# Altium PCB WiFiBoard.PcbDoc
Units mil, origin at the board's own origin, x right, y up, seen from the top; angles counter-clockwise.
Board outline 2085 x 2160 mil, 2 copper layers (Top Layer, Bottom Layer); 26 components, 32 nets, 129 pads, 19 vias.
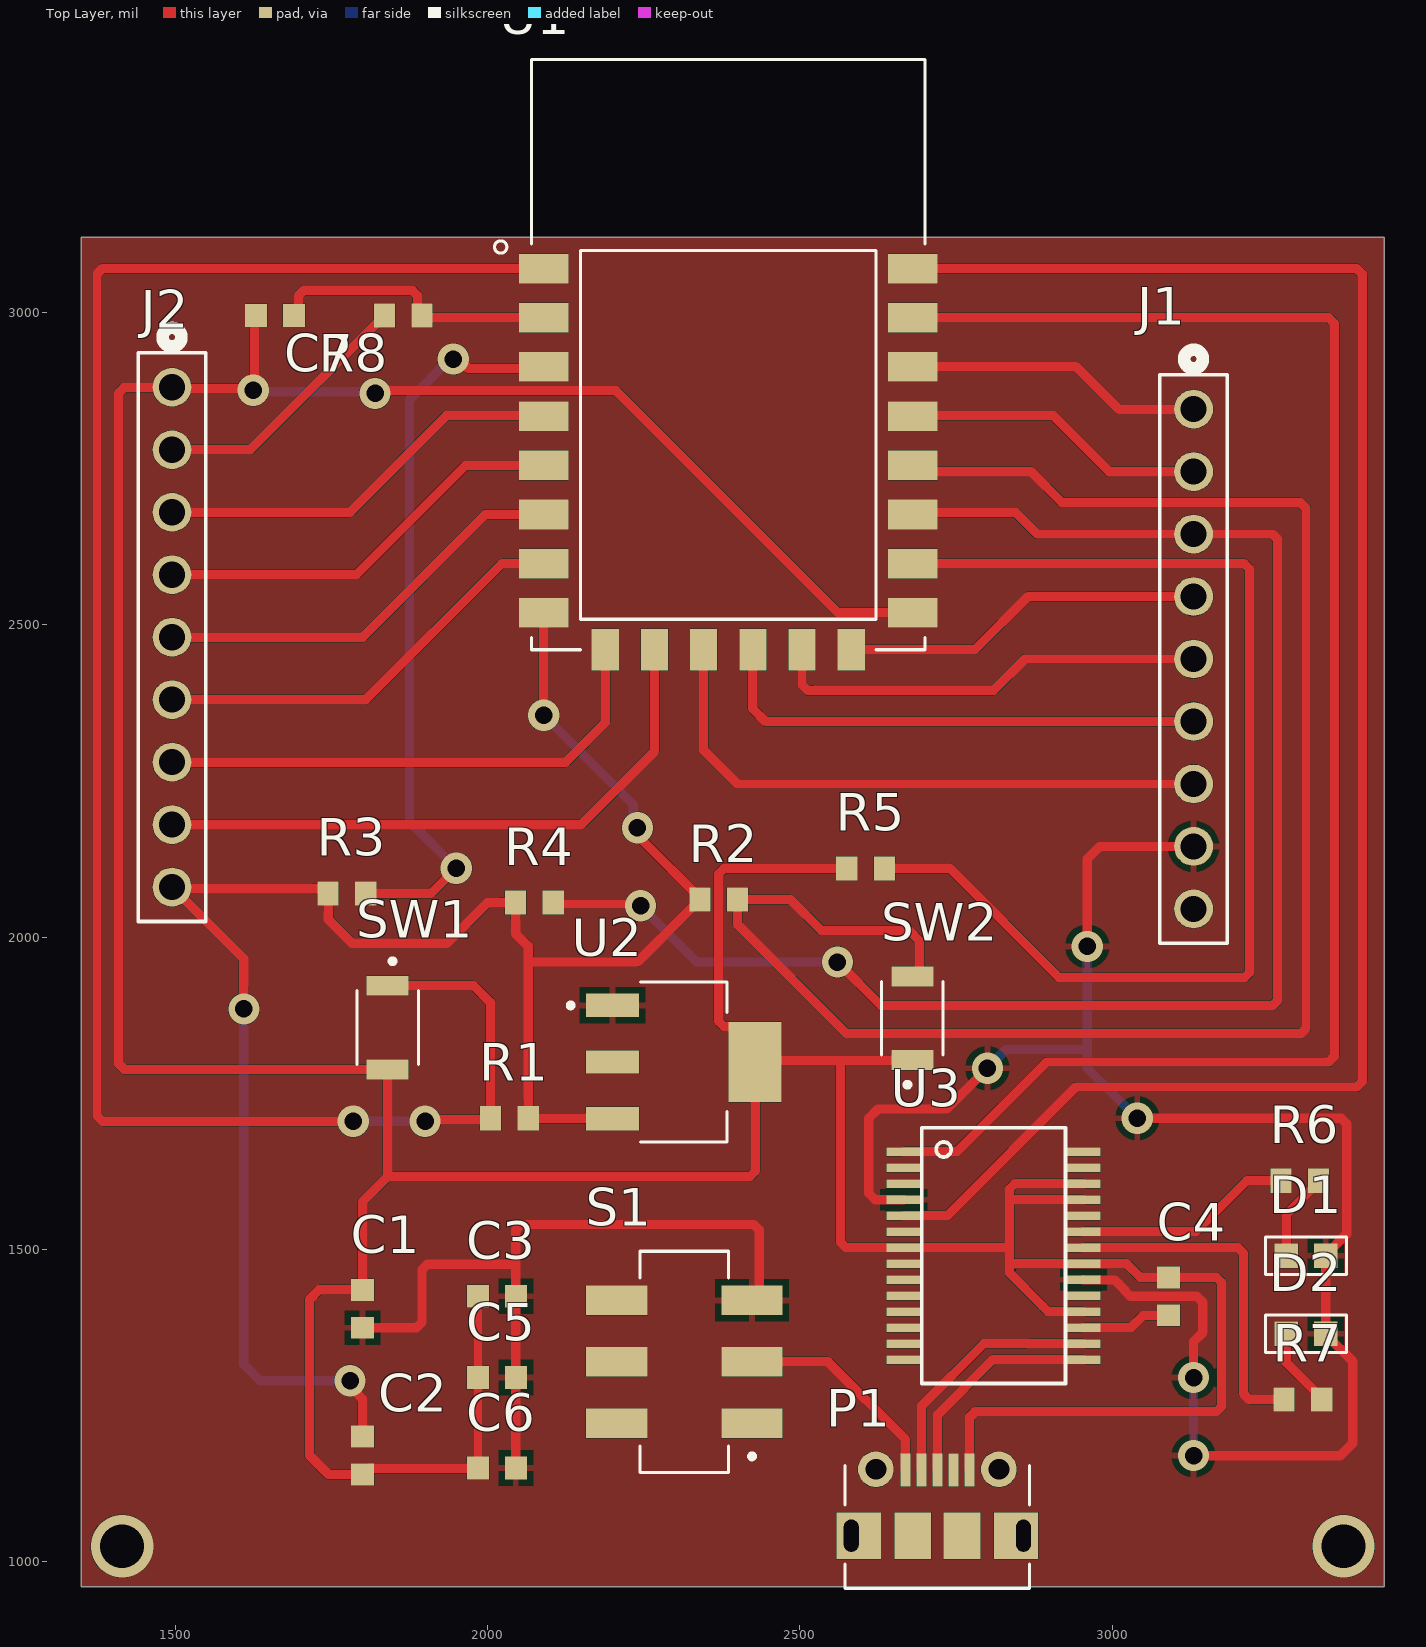
[diagram p0: Top Layer view]
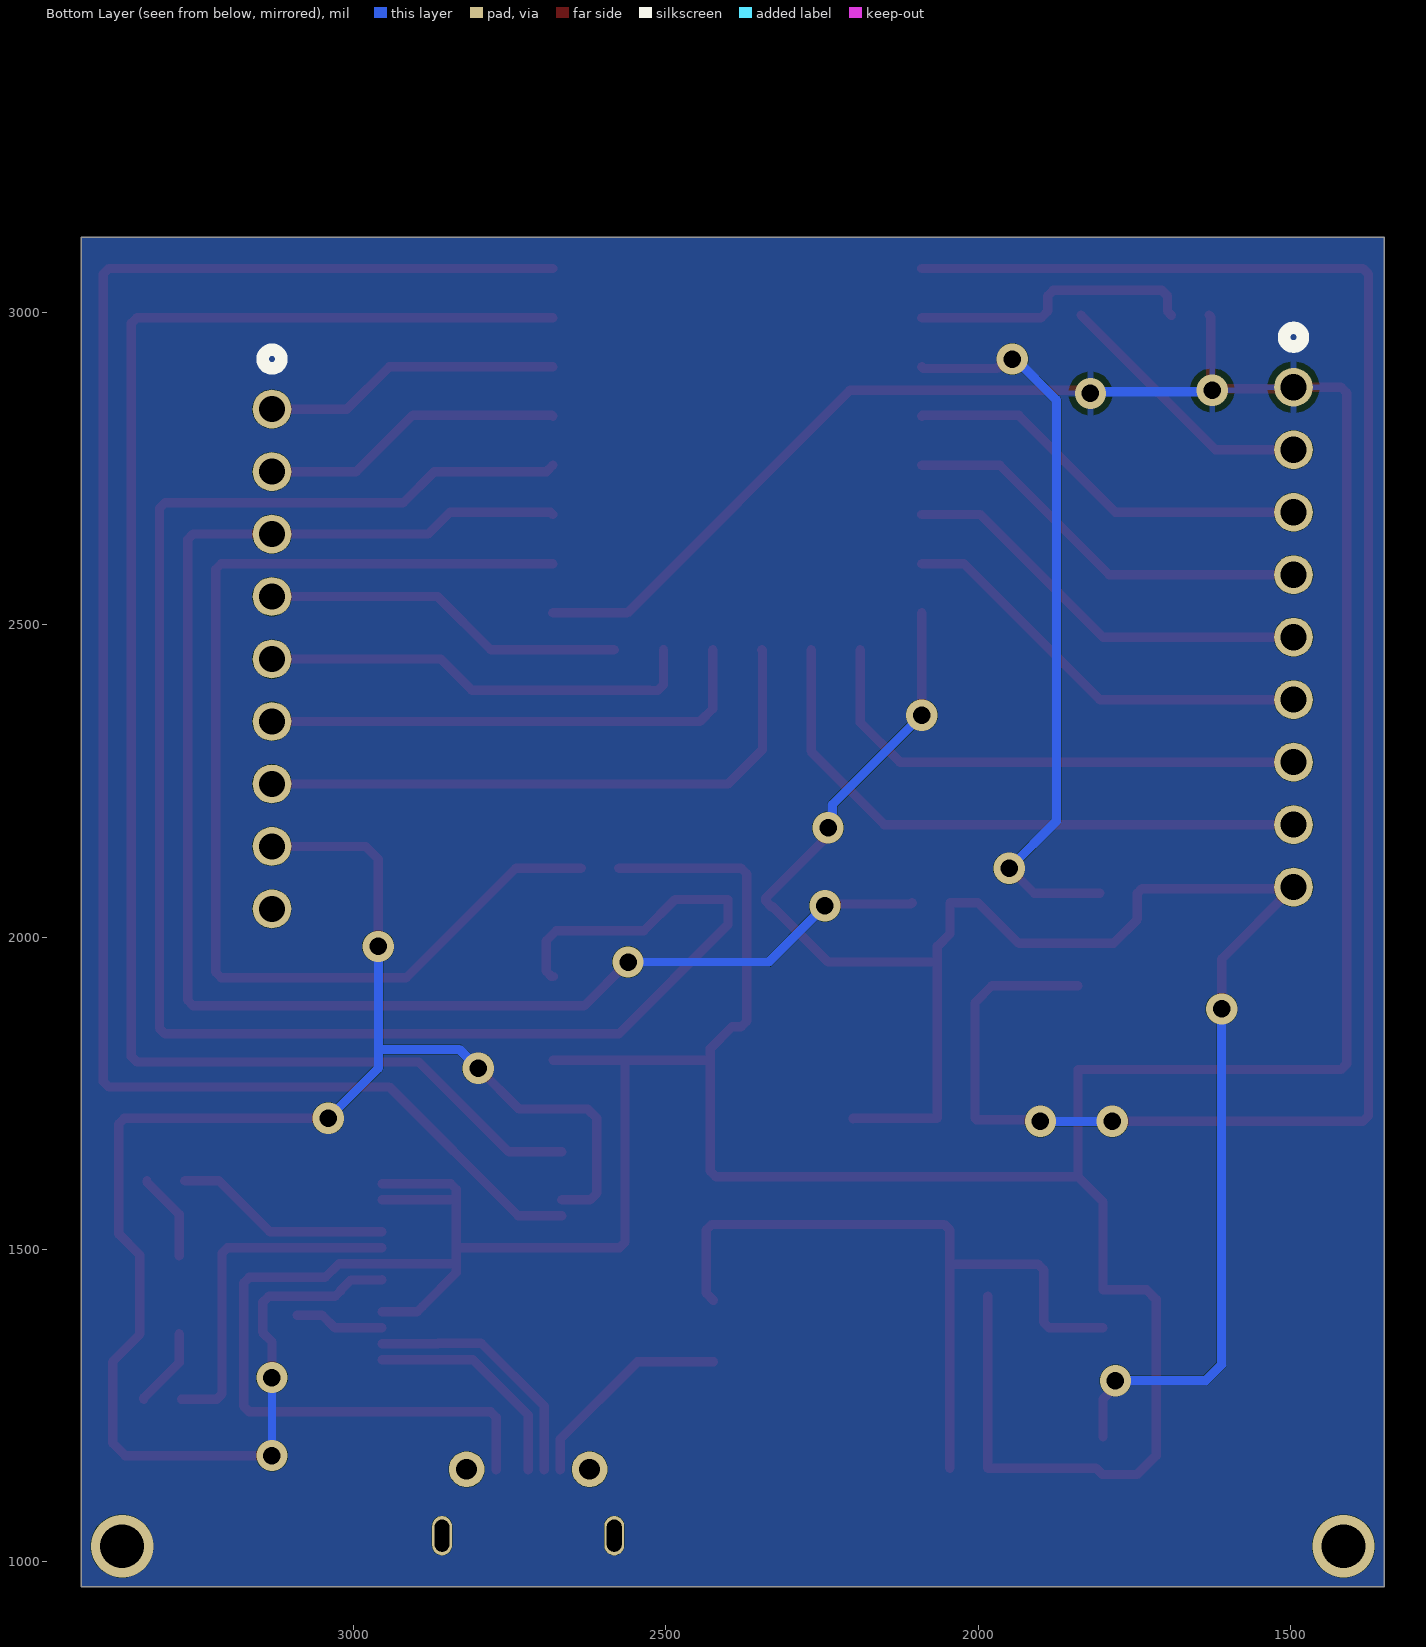
[diagram p1: Bottom Layer view, seen from below]
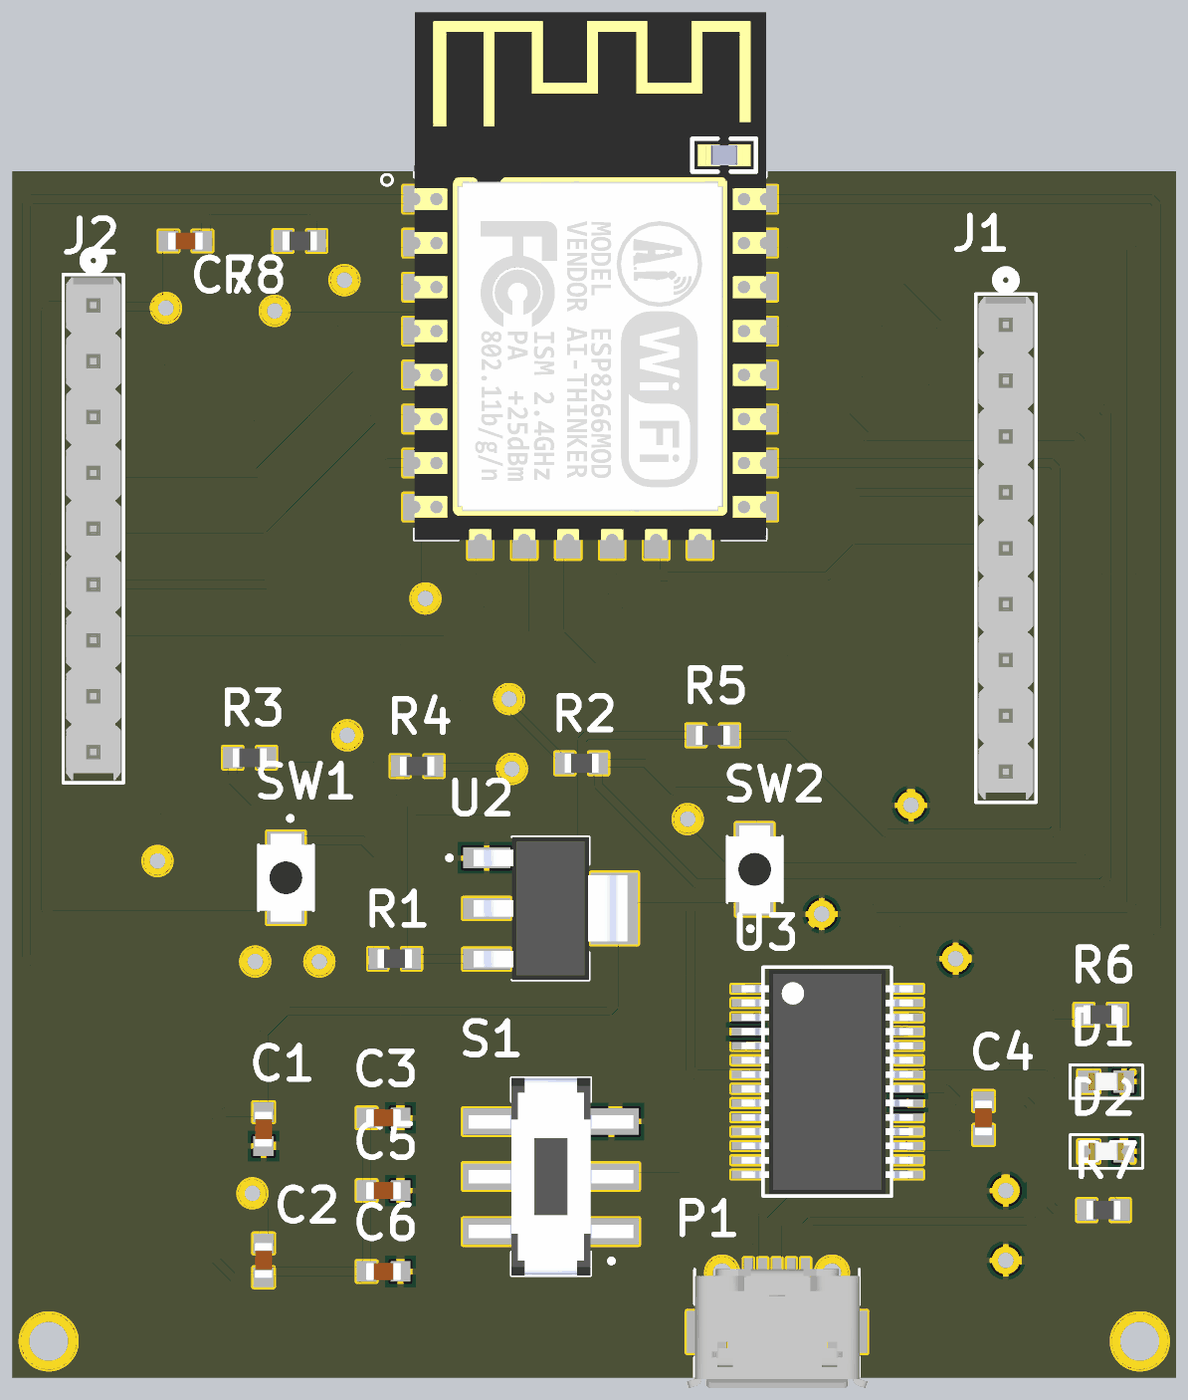
[diagram p2: 3D render of the assembled board from above, using the file's embedded part models]

## Layer stack, top to bottom
Top Solder: solder mask 0.4, Solder Resist, Dk 3.5
Top Layer: signal copper 1.4
Dielectric 1: dielectric 12.6, FR-4, Dk 4.8
Bottom Layer: signal copper 1.4
Bottom Solder: solder mask 0.4, Solder Resist, Dk 3.5

## Board outline
1350,960 3435,960 3435,3120 1350,3120

## Design rules (kind name [scope] priority, off if disabled: settings)
Clearance [All] p1: gap=0.2 ignorepadtopadclearanceinfootprint=FALSE
PolygonConnect [All] p1: connectstyle=Relief reliefconductorwidth=10 reliefentries=4 polygonreliefangle="90 Angle" airgapwidth=10
RoutingVias [All] p1: holewidth=28 width=50 viastyle="Through Hole" minholewidth=28 minwidth=50 maxholewidth=28 maxwidth=50
SolderMaskExpansion [All] p1: expansion=4 istentingtop=FALSE
SupplyNets "Schematic Supply Nets_2" [InNet('GND')] p1: voltage=0.000
SupplyNets "Schematic Supply Nets_1" [InNet('+5V')] p2: voltage=0.000
SupplyNets "Schematic Supply Nets" [InNet('3V3')] p3: voltage=0.000
Width [All] p1: maxlimit=30 minlimit=5 preferedwidth=15 minimp=50.000000 maximp=50.000000 favimp=50.000000
30 further rules are at their usual default settings.

## Components (designator, comment, footprint, x,y, rotation, side; value= is the part's Value field where it differs from the comment)
C1 "330nF" CAPC1608X90N 1800,1405 r270 top
C2 "100nF" CAPC1608X90N 1800,1170 r90 top
C3 "10uF" CAPC1608X90N 2015,1425 r0 top
C4 "100nF" CAPC1608X90N 3090,1425 r90 top
C5 "100nF" CAPC1608X90N 2015,1295 r0 top
C6 "4.7uF" CAPC1608X90N 2015,1150 r0 top
C7 "330nF" CAPC1608X90N 1660,2995 r0 top
D1 "VLMTG1300-GS08" LEDC1608X100N 3310,1490 r0 top
D2 "VLMTG1300-GS08" LEDC1608X100N 3310,1365 r0 top
J1 "Molex 22-24-4094" "Molex 22-28-4094" 3185,1990 r90 top
J2 "Molex 22-24-4094" "Molex 22-28-4094" 1550,2025 r90 top
P1 "Molex 105017-0001" "Molex 105017-0001" 2720,1095 r0 top
R1 "10K" RESC1508X50N 2035,1710 r0 top
R2 "10K" RESC1508X50N 2370,2060 r180 top
R3 "10K" RESC1508X50N 1775,2070 r180 top
R4 "10K" RESC1508X50N 2075,2055 r180 top
R5 "10K" RESC1508X50N 2605,2110 r0 top
R6 "330" RESC1508X50N 3300,1610 r0 top
R7 "330" RESC1508X50N 3305,1260 r0 top
R8 "10K" RESC1508X50N 1865,2995 r180 top
S1 "JS202011SCQN" SW_JS202011SCQN 2315,1320 r90 top
SW1 "B3U-1000P" SW_B3U-1000P 1840,1855 r270 top
SW2 "B3U-1000P" SW_B3U-1000P 2680,1870 r90 top
U1 "ESP8266_ESP12" ESP8266-ESP12 2385.28,2794.41 r0 top
U2 "UA78M33CDCY" UA78M33CDCY 2149.17,1680 r0 top
U3 "FT232RL_TUBE" FT232RL_TUBE 2810,1490 r270 top

## Footprints (in the part's own frame and the unit in brackets; to place one, negate y for a bottom-side part, rotate by r counter-clockwise, add the part's x,y. Pads: shape width x height; smd on the part's side, far side on the other; paste and mask are expansions set on the pad)
CAPC1608X90N [mm]
  rect 0.89x0.93 smd: 1(-0.77,0) 2(0.77,0)
  body extent -0.8,-0.4 0.8,0.4, height 0.9
ESP8266-ESP12 [mm]
  rect 2x1.2 smd: 1(-7.5,7) 2(-7.5,5) 3(-7.5,3) 4(-7.5,1) 5(-7.5,-1) 6(-7.5,-3) 7(-7.5,-5) 8(-7.5,-7) 15(7.5,-7) 16(7.5,-5) 17(7.5,-3) 18(7.5,-1) 19(7.5,1) 20(7.5,3) 21(7.5,5) 22(7.5,7)
  rect 1.1x1.7 smd: 9(-5,-8.5) 10(-3,-8.5) 11(-1,-8.5) 12(1,-8.5) 13(3,-8.5) 14(5,-8.5)
  silkscreen extent -9.5,-8.5 8,15.5, body extent -8,-8.5 8,15.5, height 3.17
FT232RL_TUBE [mil] "FT232RL-Tube / USB UART Asynchronous Serial Data Transfer Chip, 28-pin SSOP, Tube"
  rect 13.7x55 smd: 1(-166.34,-143.94) 2(-140.75,-143.94) 3(-115.16,-143.94) 4(-89.57,-143.94) 5(-63.98,-143.94) 6(-38.39,-143.94) 7(-12.8,-143.94) 8(12.8,-143.94) 9(38.39,-143.94) 10(63.98,-143.94) 11(89.57,-143.94) 12(115.16,-143.94) 13(140.75,-143.94) 14(166.34,-143.94) 15(166.34,143.94) 16(140.75,143.94) 17(115.16,143.94) 18(89.57,143.94) 19(63.98,143.94) 20(38.39,143.94) 21(12.8,143.94) 22(-12.8,143.94) 23(-38.39,143.94) 24(-63.98,143.94) 25(-89.57,143.94) 26(-115.16,143.94) 27(-140.75,143.94) 28(-166.34,143.94)
  silkscreen extent -205,-115 205,115, body extent -201,-154 201,154, height 79
LEDC1608X100N [mm]
  rect 0.95x1 smd: 1(-0.8,0) 2(0.8,0)
  silkscreen extent -1.65,-0.76 1.65,0.76, body extent -0.8,-0.4 0.8,0.4, height 0.8
"Molex 22-28-4094" [mil] "Molex 22-28-4094"
  round 62 hole 42: 1(855,55) 2(755,55) 3(655,55) 4(555,55) 5(455,55) 6(355,55) 7(255,55) 8(155,55) 9(55,55)
  silkscreen extent 0,1 950,109, body extent 5,6 905,104, height 415
"Molex 105017-0001" [mm] "CONN RCPT MICRO USB R/A SMD"
  rect 0.4x1.35 smd: 1(-1.3,1.325) 2(-0.65,1.325) 3(0,1.325) 4(0.65,1.325) 5(1.3,1.325)
  round 1.45 hole 0.85: P$1(-2.5,1.35) P$2(2.5,1.35)
  rect 1.5x1.9 smd: P$8(-1,-1.35) P$9(1,-1.35)
  rect 1.8x1.9 smd: P$10(-3.2,-1.35) P$11(3.2,-1.35)
  oval 0.8x1.6 hole 0.6 slot 1.3 at 90 deg: P$12(-3.5,-1.35) P$13(3.5,-1.35)
  silkscreen extent -3.75,-3.5 3.75,1.5, body extent -4.09,-3.9 4.11,1.5, height 2.87
RESC1508X50N [mm]
  rect 0.86x0.98 smd: 1(-0.765,0) 2(0.765,0)
  body extent -0.77,-0.43 0.77,0.43, height 0.55
SW_B3U-1000P [mm]
  rect 0.8x1.7 smd: 1(-1.7,0) 2(1.7,0)
  silkscreen extent -2.8,-1.25 1.5,1.25, body extent -2,-1.25 2,1.25, height 1.6
SW_JS202011SCQN [mm] "JS Series DPDT On-On Gull Wing Surface Mount Subminiature Slide Switch"
  rect 1.2x2.5 smd: 1(-2.5,-2.75) 2(0,-2.75) 3(2.5,-2.75) 4(-2.5,2.75) 5(0,2.75) 6(2.5,2.75)
  silkscreen extent -4.5,-2.85 4.5,1.8, body extent -4.5,-3.75 4.5,3.75, height 5.51
UA78M33CDCY [mm] "TI (Texas Instruments) UA78M33CDCY"
  rect 2.15x0.95 smd: 1(1.291,5.348) 2(1.291,3.048) 3(1.291,0.748)
  rect 2.15x3.25 smd: 4(7.091,3.048)
  silkscreen extent -0.51,-0.2 5.94,6.3, body extent 0.69,-0.2 7.69,6.3, height 1.8

## Part data
C1 C2 C3 C4 C5 C6 C7: library part GRM188R71C104KA01D, Package=None, Availability=Unavailable, MF="{'manufacturer': u'Murata'}", MP=GRM188R71C104KA01D, Price=None
D1 D2: "Vishay VLMTG1300-GS08, 525 nm Green LED, 1608 (0603) SMD package", Manufacturer_Name=Vishay, Datasheet Link=https://www.vishay.com/docs/82437/vlmo1300.pdf, Geometry.Height=1mm, Manufacturer_Part_Number=VLMTG1300-GS08
J1 J2: library part Molex
P1: "CONN RCPT MICRO USB R/A SMD"
R1 R2 R3 R4 R5 R8: library part CRCW06032K20FKEA, "CRCW06032K20FKEA", Package=None, Availability=Unavailable, MF="{'manufacturer': u'Vishay Dale'}", MP=CRCW06032K20FKEA, Price=None
R6 R7: library part CRCW06032K20FKEA, Package=None, Availability=Unavailable, MF="{'manufacturer': u'Vishay Dale'}", MP=CRCW06032K20FKEA, Price=None
S1: library part SW_JS202011SCQN, "JS Series DPDT On-On Gull Wing Surface Mount Subminiature Slide Switch"
SW1 SW2: "Switch Tactile N.O. SPST Round Button Gull Wing 0.05A 12VDC 1.5N SMD Embossed T/R", Package=None, Availability=Unavailable, MP=B3U-1000P, Price=None
U2: "TI (Texas Instruments) UA78M33CDCY"
U3: "FT232RL-Tube / USB UART Asynchronous Serial Data Transfer Chip, 28-pin SSOP, Tube"

## Via types
v1: diameter 50, hole 28, Top Layer to Bottom Layer, 17 vias
v2: diameter 100, hole 70, Top Layer to Bottom Layer, 2 vias

## Nets (pads, with @x,y where several pads share a name; then routed paths per layer and width w, separated by ;. In a path a pad name is that pad's centre, name@x,y a point inside that pad or via, vN(x,y) a via of type N, cw(c..) or ccw(c..) an arc to the next point about the centre after c; other vN are vias at no path point)
3V3: C2.2 J2.9 R1.2 R2.2 R3.2 R4.2 U1.8 U2.3 | length 3122.1
  Top Layer w15: v1(1610,1885) 1610,1965 J2.9 1497.5,2077.5 1737.38,2077.5 R3.2 1744.88,2028.21 1783.09,1990 1935,1990 2000,2055 R4.2 2044.88,2005.12 2065,1985 2065,1960 ; v1(1780,1290) 1780,1280.53 1800,1260.53 C2.2 ; v1(2090,2355) U1.8 ; U2.3 2199.72,1709.72 2065.39,1709.72 R1.2 2065,1710.12 2065,1960 ; R2.2 R2.2@2339.88,2062.36 ; 2065,1960 2239.88,1960 2328.09,2048.21 2330.45,2048.21 2339.88,2057.64 R2.2@2339.88,2062.36 ; v1@2246.7,2155.55 2240,2162.24 v1(2240,2175) 2246.7,2168.3 v1@2246.7,2155.55 ; v1@2246.7,2155.55 R2.2@2339.88,2062.36
  Bottom Layer w15: v1(1610,1885) 1610,1315.84 1635.84,1290 v1(1780,1290) ; v1(2090,2355) 2233.3,2211.7 2233.3,2181.7 v1(2240,2175)
+5V: C1.2 C3.2 C5.2 C6.2 D1.2 D2.2 J1.8 S1.3 U2.1 U3.4 U3.20 | length 4039.7
  Top Layer w15: C1.2 1886.21,1374.69 1895,1383.47 1895,1467.43 1903.79,1476.21 2040,1476.21 2045,1481.21 ; C3.2@2045,1424.69 2045,1481.21 ; C6.2 C5.2 C3.2@2045.32,1424.37 ; S1.3 2435,1430.16 2435,1531.21 2426.21,1540 2053.79,1540 2045,1531.21 2045,1481.21 ; U3.4 2620.43,1579.57 2610,1590 2610,1710 2624.84,1724.84 2734.84,1724.84 v1(2800,1790) ; U3.20 2954.49,1451.06 3003.94,1451.06 3009.99,1445.01 3020,1435 3020,1433.79 3028.79,1425 3135,1425 3145,1415 3145,1367.24 3130,1352.24 v1(3130,1295) ; v1(2960,1985) 2960,2125 2980,2145 J1.8 ; v1(3040,1710) 3366.21,1710 3375,1701.21 3375,1524.49 3341.5,1490.98 D1.2 D2.2 3341.5,1364.02 3385,1320.51 3385,1190 3365,1170 v1(3130,1170)
  Bottom Layer w15: v1(2800,1790) 2830,1820 2960,1820 ; v1(2960,1985) 2960,1820 ; v1(3040,1710) 2960,1790 2960,1820 ; v1(3130,1170) v1(3130,1295)
ADC: J2.2 R8.2 | length 428.9
  Top Layer w15: J2.2 1619.88,2780 R8.2
ADC_ESP: C7.2 R8.1 U1.2 | length 463.2
  Top Layer w15: C7.2 1696.75,3001.43 1696.75,3026.21 1705.54,3035 1879.5,3035 1888.29,3026.21 1888.29,3001.83 1898.86,2991.26 U1.2
CS0: J2.7 U1.9 | length 836
  Top Layer w15: J2.7 2125,2280 2188.43,2343.43 U1.9
GND: C1.1 C2.1 C3.1 C4.2 C5.1 C6.1 C7.1 J2.1 P1.5 R5.1 SW1.2 SW2.1 U1.15 U2.4 U3.7 U3.18 U3.21 U3.25 U3.26 | length 8022.2
  Top Layer w15: C7.1 1627.34,2992.66 1627.34,2877.34 v1(1625,2875) 1622.5,2877.5 1497.5,2877.5 J2.1 1418.79,2880 1410,2871.21 1410,1796.86 1418.79,1788.07 SW1.2 1840,1616.17 ; C2.1 1745.32,1139.69 1715,1170 1715,1420 1730.32,1435.32 C1.1 1800,1576.17 1840,1616.17 ; C2.1@1800.79,1139.69 1811.1,1150 C6.1 C5.1 C3.1 ; v1(1820,2870) 1825,2875 2205,2875 2561.18,2518.82 U1.15 ; R5.1 2378.79,2110 2370,2101.21 2370,1865.26 2378.79,1856.48 2393.52,1856.48 2428.35,1821.65 U2.4 ; SW2.1 2565,1803.07 ; P1.5 2771.18,1231.18 2780,1240 3166.21,1240 3175,1248.79 3175,1446.53 3166.21,1455.32 C4.2 3044.69,1455.32 3022.8,1477.2 U3.21 2835,1477.2 ; U3.18 2897.57,1400.43 2888.79,1409.22 2835,1463.01 2835,1477.2 ; U3.25 2835,1579.57 ; U3.26 2843.79,1605.16 2835,1596.37 2835,1579.57 ; 1840,1616.17 2419.56,1616.17 2428.35,1624.96 U2.4 ; U2.4 2431.42,1803.07 2565,1803.07 ; 2565,1803.07 2565,1511.58 2573.79,1502.8 U3.7 2835,1502.8 ; 2835,1477.2 2835,1502.8 ; 2835,1502.8 2835,1579.57
  Bottom Layer w15: v1(1625,2875) 1627.5,2872.5 1817.5,2872.5 v1(1820,2870)
GPIO4: J1.2 U1.19 | length 487.2
  Top Layer w15: U1.19 2681.77,2835 2905,2835 2995,2745 J1.2
GPIO5: J1.1 U1.20 | length 477.4
  Top Layer w15: U1.20 2942.48,2912.52 3010,2845 J1.1
GPIO9: J1.7 U1.11 | length 967.9
  Top Layer w15: U1.11 2345,2458.86 2345,2300 2400,2245 J1.7
GPIO10: J1.6 U1.12 | length 808.2
  Top Layer w15: U1.12 2424.65,2365.35 2445,2345 J1.6
GPIO12: J2.5 U1.6 | length 676.3
  Top Layer w15: J2.5 1800,2480 1996.3,2676.3 U1.6
GPIO13: J2.6 U1.7 | length 685.1
  Top Layer w15: J2.6 1805,2380 2022.56,2597.56 U1.7
GPIO16: J2.3 U1.4 | length 659.7
  Top Layer w15: J2.3 1780,2680 1935,2835 2088.78,2835 U1.4
MISO: J2.8 U1.10 | length 983.3
  Top Layer w15: J2.8 2150,2180 2267.17,2297.17 U1.10
MOSI: J1.5 U1.13 | length 707.3
  Top Layer w15: U1.13 2503.39,2403.8 2512.59,2394.6 2524.6,2394.6 2525,2395 2810,2395 2860,2445 J1.5
NetC4_1: C4.1 U3.17 | length 144.3
  Top Layer w15: U3.17 3029.84,1374.84 3049.69,1394.69 C4.1
NetD1_1: D1.1 R6.2 | length 141.4
  Top Layer w15: D1.1 3278.5,1556.02 3330.12,1607.64 R6.2
NetD2_1: D2.1 R7.2 | length 128.5
  Top Layer w15: D2.1 3278.5,1318.98 3335.12,1262.36 R7.2
NetP1_1: P1.1 S1.2 | length 345.9
  Top Layer w15: S1.2 2545.06,1320 2668.82,1196.24 P1.1
NetR1_1: R1.1 SW1.1 U1.1 | length 3062.6
  Top Layer w15: v1(1785,1705) 1383.79,1705 1375,1713.79 1375,3061.21 1383.79,3070 U1.1 ; SW1.1 1977.83,1921.93 2004.88,1894.88 R1.1 2002.38,1707.5 1902.5,1707.5 v1(1900,1705)
  Bottom Layer w15: v1(1785,1705) v1(1900,1705)
NetR2_1: R2.1 SW2.2 U1.18 | length 2898.2
  Top Layer w15: SW2.2 2682.86,1936.93 2691.1,1945.18 2691.1,1994.07 2675.18,2010 2535,2010 2485,2060 R2.1 2400.12,2019.88 2575,1845 3301.21,1845 3310,1853.79 3310,2686.21 3301.21,2695 2920,2695 2870,2745 2690.59,2745 U1.18
NetR3_1: R3.1 U1.3 | length 1191.7
  Top Layer w15: R3.1 1910,2070 v1(1950,2110) ; v1(1945,2925) 1954.47,2925 1969.47,2910 2087.48,2910 U1.3
  Bottom Layer w15: v1(1945,2925) 1940,2925 1875,2860 1875,2185 v1(1950,2110)
NetR5_2: R5.2 U1.16 | length 1849.1
  Top Layer w15: R5.2 2740,2110 2915,1935 3211.21,1935 3220,1943.79 3220,2588.77 3211.21,2597.56 U1.16
NetR6_1: R6.1 U3.23 | length 349.7
  Top Layer w15: U3.23 3133.39,1528.39 3215,1610 R6.1
NetR7_1: R7.1 U3.22 | length 553.4
  Top Layer w15: U3.22 3201.21,1502.8 3210,1494.01 3210,1268.79 3218.79,1260 R7.1
NetU1_21: U1.21 U3.1 | length 2603.9
  Top Layer w15: U3.1 2751.34,1656.34 2895,1800 3346.21,1800 3355,1808.79 3355,2982.47 3346.21,2991.26 U1.21
NetU1_22: U1.22 U3.5 | length 2838.4
  Top Layer w15: U3.5 2736.02,1553.98 2942.05,1760 3391.21,1760 3400,1768.79 3400,3061.21 3391.21,3070 U1.22
SCL: J2.4 U1.5 | length 667.5
  Top Layer w15: J2.4 1790,2580 1965.04,2755.04 U1.5
SCLK: J1.4 U1.14 | length 583.2
  Top Layer w15: U1.14 2779.76,2459.76 2865,2545 J1.4
SDA: J1.3 R4.1 U1.17 | length 2573.4
  Top Layer w15: R4.1 2107.19,2052.92 2115.29,2052.92 2242.08,2052.92 v1(2245,2050) ; v1(2560,1960) 2630,1890 3256.21,1890 3265,1898.79 3265,2636.21 3256.21,2645 J1.3 2880,2645 2845,2680 2684.25,2680 U1.17
  Bottom Layer w15: v1(2245,2050) 2335,1960 v1(2560,1960)
USB_N: P1.2 U3.16 | length 403.7
  Top Layer w15: P1.2 2694.41,1249.41 2795,1350 2864.42,1350 2865.17,1349.25 U3.16
USB_P: P1.3 U3.15 | length 358.5
  Top Layer w15: P1.3 2720,1235 2808.66,1323.66 U3.15
pads on no net: J1.9 P1.4 P1.P$1 P1.P$2 P1.P$8 P1.P$9 P1.P$10 P1.P$11 P1.P$12 P1.P$13 S1.1 S1.4 S1.5 S1.6 U2.2 U3.2 U3.3 U3.6 U3.8 U3.9 U3.10 U3.11 U3.12 U3.13 U3.14 U3.19 U3.24 U3.27 U3.28
copper on no net:
  other v2: 1415,1025 3370,1025

## Polygon pours and split planes (outlines as drawn)
3V3 on Top Layer "3V3" (solid, remove dead copper, pour order 1): 1350,960 3435,960 3435,3120 1350,3120
+5V on Top Layer "+5V" (solid, remove dead copper, pour order 0): 1350,960 3435,960 3435,3120 1350,3120
GND on Bottom Layer "GND" (solid, remove dead copper, pour order 2): 1350,960 3435,960 3435,3120 1350,3120

## Silkscreen, mask and mechanical layers (free items; w line width, h text height)
Bottom Assembly:
  text "ALA HASSINE" at 1530,995 h90